# Altium PCB 32Guitar.pcbdoc
Units mil, origin at the board's own origin, x right, y up, seen from the top; angles counter-clockwise.
Board outline 3565.97 x 3436.2 mil, 2 copper layers (Top Layer, Bottom Layer); 1 components, 0 nets, 0 pads, 0 vias.
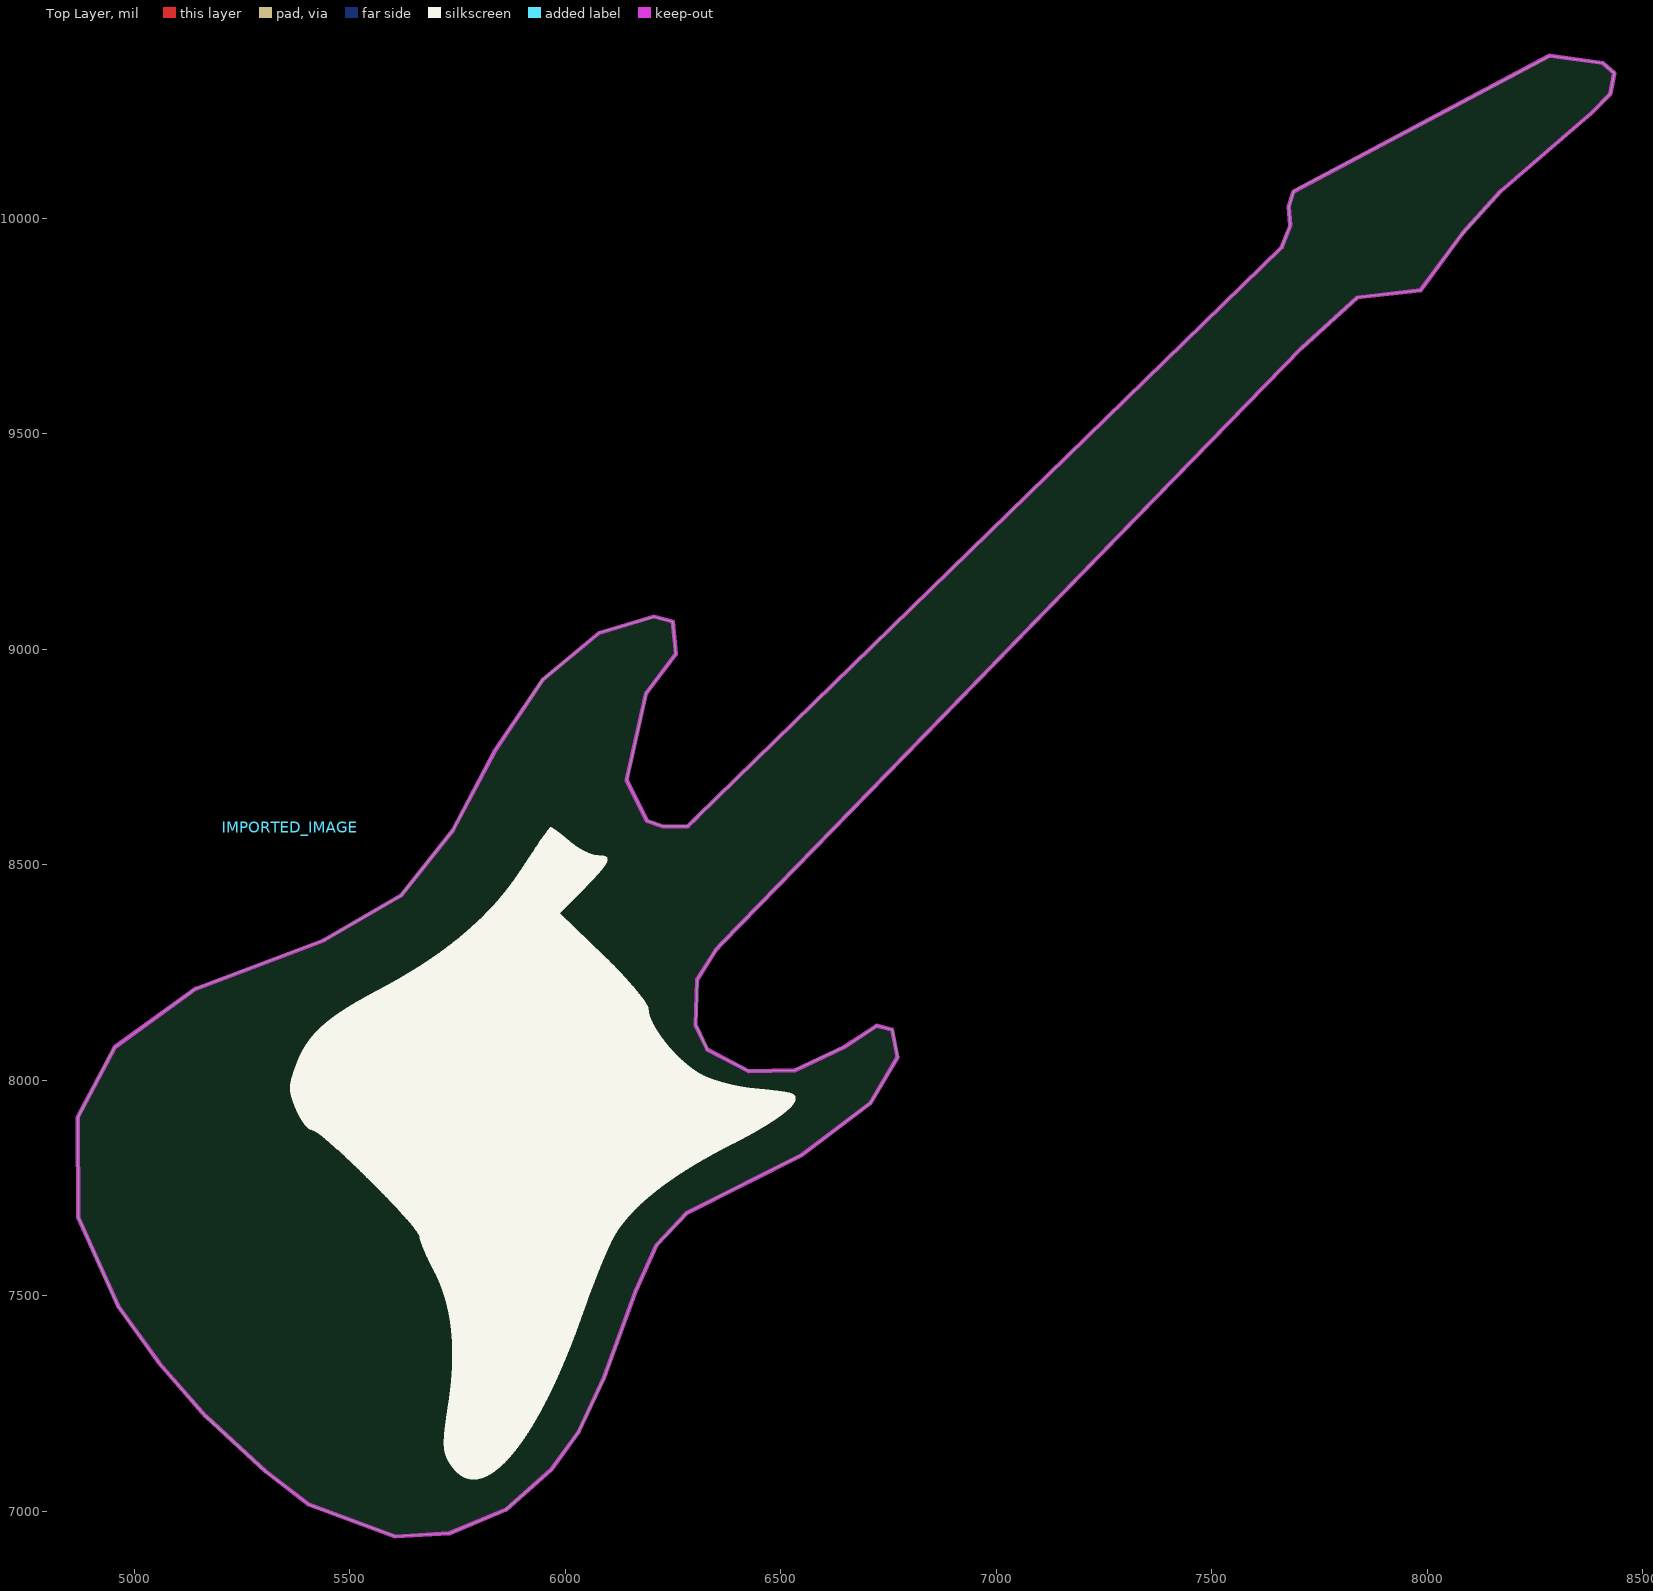
[diagram p0: Top Layer view]
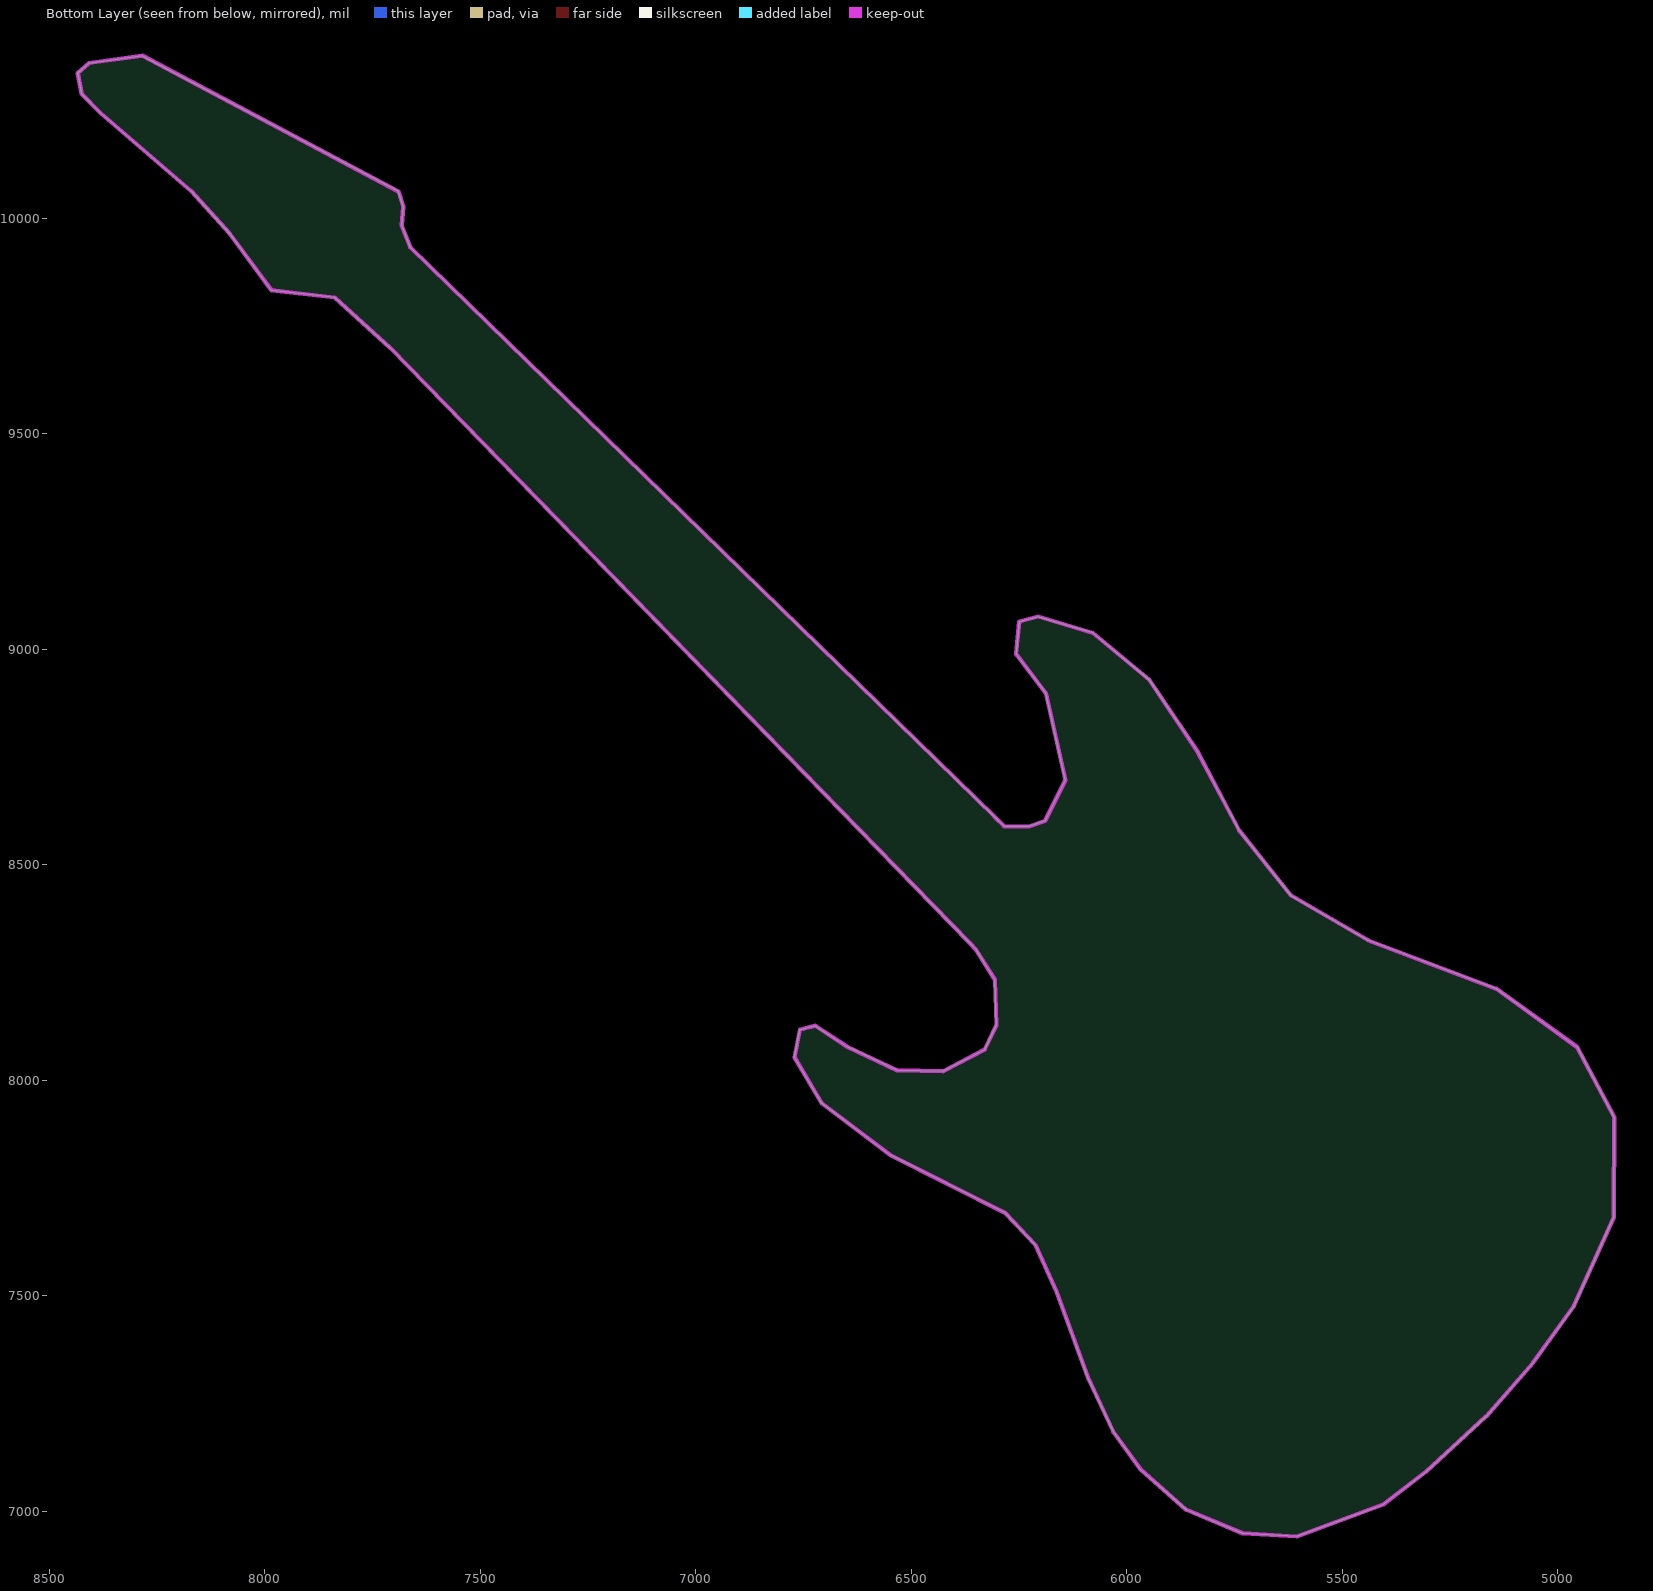
[diagram p1: Bottom Layer view, seen from below]

## Layer stack, top to bottom
Top Solder: solder mask 0.4, Solder Resist, Dk 3.5
Top Layer: signal copper 1.4
Dielectric1: dielectric 12.6, FR-4, Dk 4.8
Bottom Layer: signal copper 1.4
Bottom Solder: solder mask 0.4, Solder Resist, Dk 3.5

## Board outline
5305.93,7091.15 5165.63,7220.15 5057.17,7343.86 4962.65,7475.43 4869.53,7683.22 4868.29,7913.71 4954.76,8077.3 5141.83,8212.26 5439.45,8324.85 5619.32,8429.32 5738.58,8579.44 5836.67,8764.9 5947.58,8929.43 6078.27,9038.06 6205.48,9076.14 6249.12,9064.35 6256.72,8988.93 6187.22,8898.25 6142.22,8696.33 6189.4,8602.16 6226.89,8589.09 6283.77,8589.09 6305.88,8611.2 7662.13,9932.43 7682.26,9984.31 7678.38,10026.53 7690.11,10062.73 8284.5,10377.74 8408.07,10360.48 8434.25,10337.18 8424.93,10288.94 8381.3,10244.81 8170.86,10063.56 8081.26,9964.62 7984.5,9833.14 7837.63,9816.56 7709.49,9700.19 6364.35,8318.9 6348.73,8302.05 6305.67,8232.9 6302.18,8127.86 6329.23,8071.43 6425.65,8021 6532.3,8022.99 6647.69,8077.43 6722.92,8126.53 6731.7,8124.31 6749.28,8119.88 6758.06,8117.67 6770.94,8052.99 6707.35,7946.46 6548.99,7826.77 6281.72,7692.26 6211.45,7617.39 6162.84,7509.84 6089.82,7310.26 6031.1,7184.56 5967.92,7097.09 5861.75,7003.58 5731.23,6948.88 5604.77,6941.54 5405.01,7015.5

## Design rules (kind name [scope] priority, off if disabled: settings)
Clearance [All] p1: gap=10 ignorepadtopadclearanceinfootprint=FALSE except(0: Arc-Hole Track-Hole SMDPad-Hole THPad-Hole Via-Hole Fill-Hole Poly-Hole Region-Hole Text-Hole)
PolygonConnect [All] p1: connectstyle=Relief reliefconductorwidth=10 reliefentries=4 polygonreliefangle="90 Angle" airgapwidth=10
RoutingVias [All] p1: holewidth=28 width=50 viastyle="Through Hole" minholewidth=28 minwidth=50 maxholewidth=28 maxwidth=50
SolderMaskExpansion [All] p1: expansion=4
Width [All] p1: maxlimit=10 minlimit=10 preferedwidth=10
30 further rules are at their usual default settings.

## Components (designator, comment, footprint, x,y, rotation, side; value= is the part's Value field where it differs from the comment)
IMPORTED_IMAGE "Comment" IMPORTED_IMAGE 5361.5,8587.16 r0 top

## Footprints (in the part's own frame and the unit in brackets; to place one, negate y for a bottom-side part, rotate by r counter-clockwise, add the part's x,y. Pads: shape width x height; smd on the part's side, far side on the other; paste and mask are expansions set on the pad)
IMPORTED_IMAGE [mil]
  silkscreen extent 0,-1513 1173,0

## Nets (pads, with @x,y where several pads share a name; then routed paths per layer and width w, separated by ;. In a path a pad name is that pad's centre, name@x,y a point inside that pad or via, vN(x,y) a via of type N, cw(c..) or ccw(c..) an arc to the next point about the centre after c; other vN are vias at no path point)

## Keep-outs
Keep-Out Layer:
  the board outline again, w10

## Silkscreen, mask and mechanical layers (free items; w line width, h text height)
Document:
  lines w0.1: 2815.12,11660.86 2817.12,11662.86 ; 6325.49,6555.37 6327.49,6557.37